# EAGLE board rbmc_smdfree (EAGLE 9.3.1)
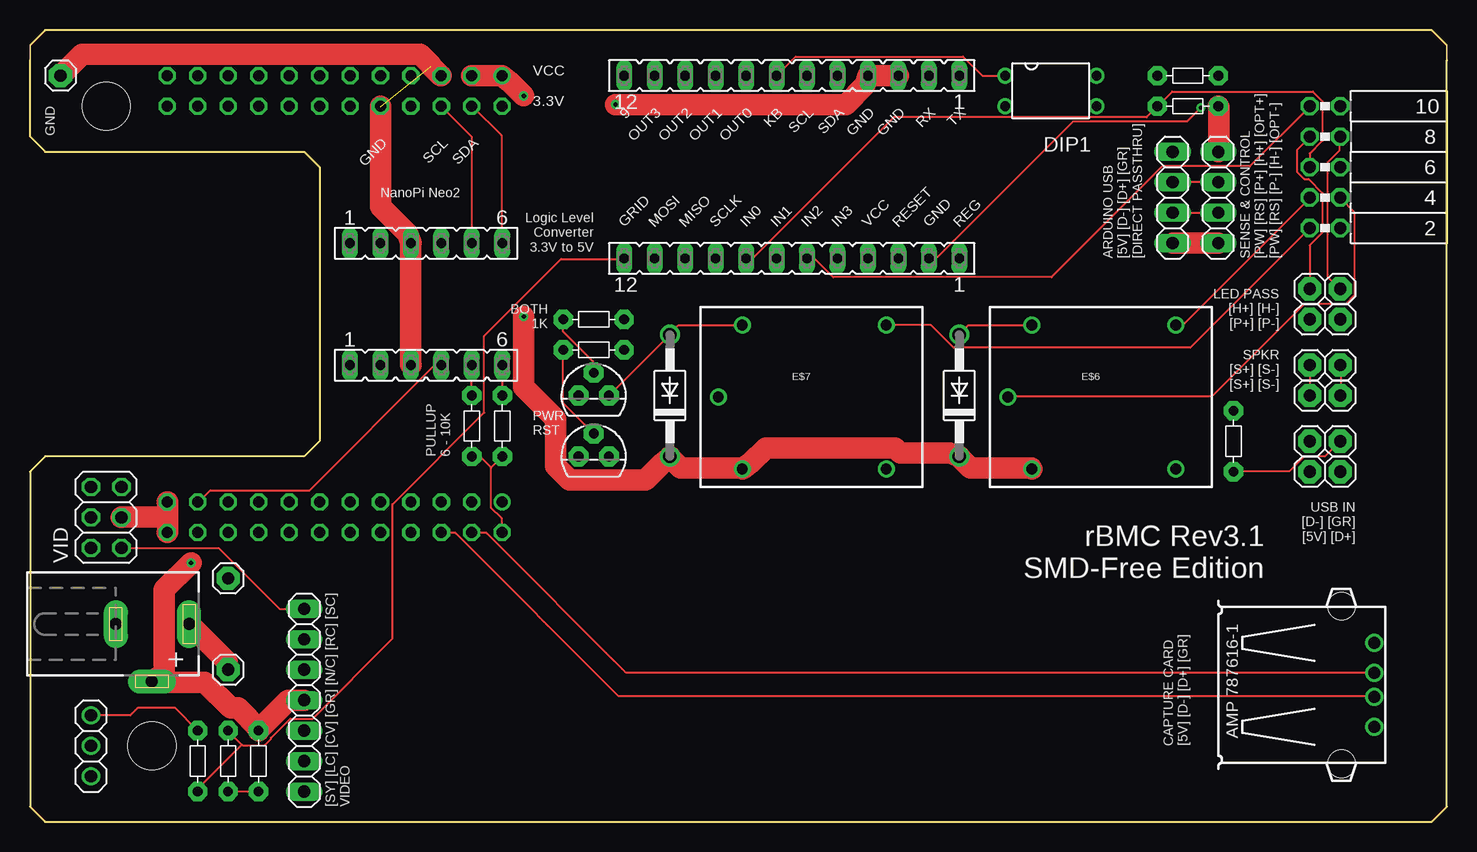
[diagram p0: board, top side]
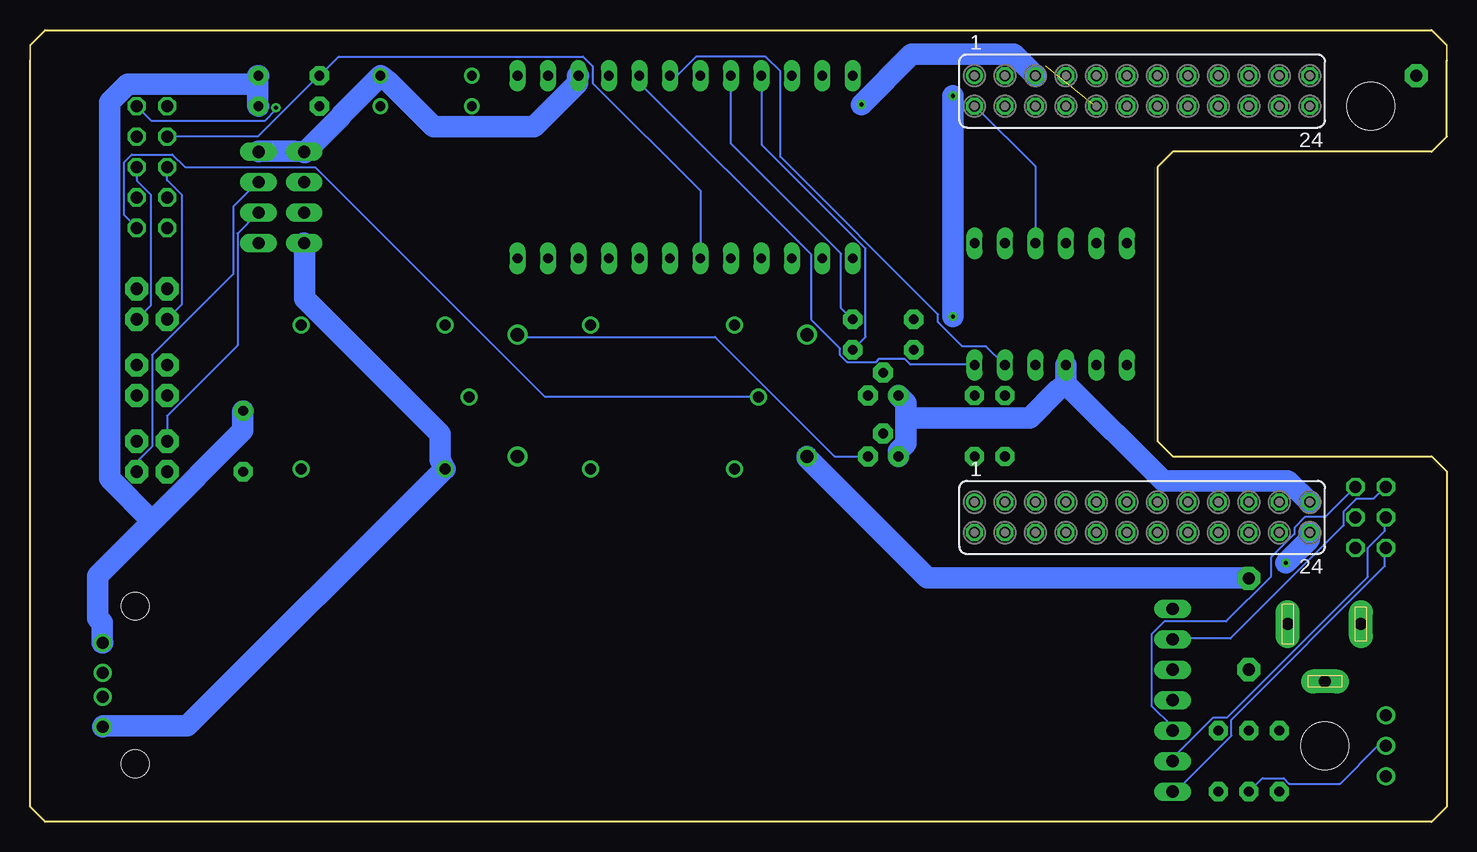
[diagram p1: board, bottom side, seen from below]

Size 118.11 x 66.04 mm. Coordinates in mm from the lower left corner, seen from the top.
Outline: 1.27,55.88 22.86,55.88 24.13,54.61 24.13,31.75 22.86,30.48 1.27,30.48 0,29.21 0,1.27 1.27,0 116.84,0 118.11,1.27 118.11,63.5 118.11,64.77 116.84,66.04 1.27,66.04 0,64.77 0,63.5 0,57.15 1.27,55.88
Copper layers (1*16): Top 0.035mm / dielectric 1.5mm / Bottom 0.035mm
Design rules "default *": minimum track width 6mil, minimum drill 0.35mm, track to track 8mil, track to pad 6mil, pad to pad 6mil, via to via 6mil, smd to smd 6mil, copper to edge 40mil, drill to drill 6mil, minimum pad ring 10mil, minimum via ring 8mil, stop-mask expansion 4mil, vias tented up to drill 0mil, thermal gap 10mil
Net classes: 1 vcc: width 1.778 mm; 2 gnd: width 1.778 mm; 3 data: width 0.127 mm
Holes 4 mm at 6.35,59.69 10.16,6.35

## Footprints (pad centres in the part's own frame; a part is rotated, then mirrored left to right if it is on the bottom)
DIP4 = drill 0.8: 1 -1.27,-3.81; 2 1.27,-3.81; 3 1.27,3.81; 4 -1.27,3.81
FE12 = drill 0.813 long: 1 -13.97,0; 2 -11.43,0; 3 -8.89,0; 4 -6.35,0; 5 -3.81,0; 6 -1.27,0; 7 1.27,0; 8 3.81,0; 9 6.35,0; 10 8.89,0; 11 11.43,0; 12 13.97,0
FE12-2 = drill 0.914: 1 -13.97,1.27 | drill 0.914 octagon: 2 -13.97,-1.27; 3 -11.43,1.27; 4 -11.43,-1.27; 5 -8.89,1.27; 6 -8.89,-1.27; 7 -6.35,1.27; 8 -6.35,-1.27; 9 -3.81,1.27; 10 -3.81,-1.27; 11 -1.27,1.27; 12 -1.27,-1.27; 13 1.27,1.27; 14 1.27,-1.27; 15 3.81,1.27; 16 3.81,-1.27; 17 6.35,1.27; 18 6.35,-1.27; 19 8.89,1.27; 20 8.89,-1.27; 21 11.43,1.27; 22 11.43,-1.27; 23 13.97,1.27; 24 13.97,-1.27
FE05-2W = drill 1.016 octagon: 1 -5.08,1.27; 2 -5.08,-1.27; 3 -2.54,1.27; 4 -2.54,-1.27; 5 0,1.27; 6 0,-1.27; 7 2.54,1.27; 8 2.54,-1.27; 9 5.08,1.27; 10 5.08,-1.27
SRD-05VDC-SL-C = drill 0.9: COIL0 -5.39,-6.12; COIL1 -5.39,5.88; SWCLOSED 6.61,-6.12; SWCOMMON -7.39,-0.12; SWOPEN 6.61,5.88
DO41-10 = drill 1.118: A 5.08,0; C -5.08,0
R-5 = drill 0.813 pad 1.6 octagon: 1 -2.54,0; 2 2.54,0
1X01 = drill 1.016 pad 1.93 octagon: 1 0,0
1X04 = drill 1.016 long: 1 -3.81,0; 2 -1.27,0; 3 1.27,0; 4 3.81,0
USB = drill 1: 1 -3.5,12.99; 2 -1,12.99; 3 1,12.99; 4 3.5,12.99 | hole 2.3: -6.57,10.28; 6.57,10.28
FE06 = drill 0.813 long: 1 -6.35,0; 2 -3.81,0; 3 -1.27,0; 4 1.27,0; 5 3.81,0; 6 6.35,0
TO92 = drill 0.813 pad 1.676 octagon: 1 -1.27,0; 2 0,1.905; 3 1.27,0
2X03 = drill 1.016 octagon: 1 -2.54,-1.27; 2 -2.54,1.27; 3 0,-1.27; 4 0,1.27; 5 2.54,-1.27; 6 2.54,1.27
1X07 = drill 1.016 long: 1 -7.62,0; 2 -5.08,0; 3 -2.54,0; 4 0,0; 5 2.54,0; 6 5.08,0; 7 7.62,0
DCJ0202 = drill 1 pad 2 long: 1 0,3.1; 2 4.8,0; 3 0,-3
1X03 = drill 1.016: 1 -2.54,0; 2 0,0; 3 2.54,0

## Placement (x,y rotation side)
DIP1  [DIP4]  85.09,60.96 270 top
E$1  [FE12]  63.5,62.23 180 top
E$2  [FE12-2]  25.4,25.4 0 bottom
E$3  [FE12]  63.5,46.99 180 top
E$4  [FE12-2]  25.4,60.96 0 bottom
E$5  [FE05-2W]  107.95,54.61 90 top
E$6  [SRD-05VDC-SL-C]  88.9,35.56 0 top
E$7  [SRD-05VDC-SL-C]  64.77,35.56 0 top
E$8  [DO41-10]  77.47,35.56 90 top
E$9  [DO41-10]  53.34,35.56 90 top
E$10  [R-5]  19.05,5.08 90 top
E$11  [1X01]  16.51,20.32 0 top
E$12  [R-5]  13.97,5.08 90 top
E$13  [R-5]  16.51,5.08 90 top
E$14  [1X01]  109.22,31.75 0 top
E$15  [1X01]  106.68,31.75 0 top
E$16  [1X01]  106.68,29.21 0 top
E$17  [1X01]  109.22,29.21 0 top
E$18  [1X01]  109.22,44.45 0 top
E$19  [1X01]  106.68,44.45 0 top
E$20  [1X01]  106.68,41.91 0 top
E$21  [1X01]  109.22,41.91 0 top
E$22  [1X01]  2.54,62.23 0 top
E$23  [R-5]  100.33,31.75 270 top
E$24  [1X04]  95.25,52.07 90 top
E$25  [1X04]  99.06,52.07 90 top
E$26  [R-5]  46.99,39.37 180 top
E$27  [R-5]  46.99,41.91 180 top
E$28  [1X01]  109.22,38.1 0 top
E$29  [1X01]  106.68,38.1 0 top
E$30  [1X01]  106.68,35.56 0 top
E$31  [1X01]  109.22,35.56 0 top
E$32  [USB]  99.06,11.43 270 top
E$33  [R-5]  96.52,62.23 0 top
E$34  [R-5]  96.52,59.69 0 top
E$35  [R-5]  36.83,33.02 270 top
E$36  [R-5]  39.37,33.02 270 top
HV  [FE06]  33.02,38.1 0 top
LV  [FE06]  33.02,48.26 0 top
PWRT  [TO92]  46.99,35.56 0 top
RSTT  [TO92]  46.99,30.48 0 top
SUPPLY  [1X01]  16.51,12.7 0 top
VID  [2X03]  6.35,25.4 90 top
VIDEOIN  [1X07]  22.86,10.16 90 top
VIN  [DCJ0202]  10.16,16.51 270 top
WALL  [1X03]  5.08,6.35 90 top

## Library data of the parts
DIP1 = optocoupler
E$1-E$5 HV LV = con-lsta
E$6 E$7 = SRD-05VDC-SL-C
E$8 E$9 = diode
E$10 E$12 E$13 E$23 E$26 E$27 E$33-E$36 = discrete
E$11 E$14-E$22 E$28-E$31 PWRT RSTT SUPPLY WALL = adafruit
E$24 E$25 VID VIDEOIN = pinhead
E$32 = con-amp
VIN = con-jack

## Nets
5V: E$2.2 E$35.2 E$36.2
CVBS: VID.5 VIDEOIN.3
DM1 [data]: E$2.6 E$32.3
DP1 [data]: E$2.4 E$32.2
GND [gnd]: DIP1.4 E$1.3 E$1.4 E$2.23 E$2.24 E$4.5 E$4.10 E$10.2 E$22.1 E$23.1 E$24.4 E$25.4 E$32.1 E$33.2 E$34.2 HV.3 LV.3 PWRT.1 RSTT.1 VID.3 VIDEOIN.4 VIN.2
GRID: E$12.2 WALL.3
GRID_GND: E$10.1 E$13.1 WALL.2
HDD+: E$3.7 E$5.7 E$19.1 E$33.1
HDD-: E$5.8 E$18.1
KB_CONN: DIP1.1 E$1.7
LC: VID.4 VIDEOIN.2
OUT0: E$1.8 E$27.1
OUT1: E$1.9 E$26.1
OUT2: E$1.10
OUT3: E$1.11
PC_D+: E$17.1 E$24.3 E$25.3
PC_D-: E$15.1 E$24.2 E$25.2
PCOIL_GND: E$7.COIL1 E$9.A PWRT.3
PWR+: E$3.8 E$5.5 E$20.1 E$34.1
PWR-: E$5.6 E$21.1
PWRPINA: E$5.1 E$7.SWOPEN
PWRPINB: E$5.2 E$7.SWCOMMON
PWRSENSE: E$3.12 E$12.1 E$13.2
RC: VID.6 VIDEOIN.6
RCOIL_GND: E$6.COIL1 E$8.A RSTT.3
RSTPINA: E$5.3 E$6.SWOPEN
RSTPINB: E$5.4 E$6.SWCOMMON
S$1: E$4.2 LV.4
S$3 [data]: E$4.4 LV.6
S$4 [data]: E$4.6 LV.5
S$7: E$2.21 HV.4
S$10: E$26.2 RSTT.2
S$13: E$27.2 PWRT.2
S$22: E$3.6 E$5.9
S$23: E$3.2 E$5.10
S$26: E$14.1 E$23.2
S+: E$29.1 E$30.1
S-: E$28.1 E$31.1
SC: VID.1 VIDEOIN.7
SCL5V [data]: E$1.6 E$35.1 HV.5
SDA5V [data]: E$1.5 E$36.1 HV.6
SUPPLY [vcc]: SUPPLY.1 VIN.1
SY: VID.2 VIDEOIN.1
VCC [vcc]: E$4.1 E$4.3 E$6.COIL0 E$7.COIL0 E$8.C E$9.C E$11.1 E$24.1 E$25.1 E$32.4

## Tracks (layer width: path | path; a pad name or v marks a point on that pad's centre or on a via)
5V
  Top 0.152: E$36.2 38.45,29.56 | 38.45,29.56 38.41,29.52 38.41,26.23 39.29,25.34 39.29,24.18 E$2.2 | 38.45,29.56 37.6,30.4 36.89,30.4 E$35.2
CVBS
  Bottom 0.152: VID.5 10.13,25.43 11.82,25.43 12.71,24.54 12.71,24 14.67,22.05 14.67,20.45 18.4,16.71 23.56,16.71 24.62,15.65 24.62,9.69 22.94,8 22.94,7.64 VIDEOIN.3
DM1
  Top 0.152: E$2.6 34.31,24.09 35.47,24.09 49.07,10.49 112.01,10.49 E$32.3
DP1
  Top 0.152: E$2.4 36.89,24.09 38.05,24.09 49.7,12.45 112.01,12.45 E$32.2
GND  (via drill 0.35)  (1 unrouted)
  Top 1.778: 19.11,7.73 19.02,7.64 E$10.2 | 19.11,7.73 21.51,10.13 22.85,10.13 VIDEOIN.4 | 19.11,7.73 17.34,9.51 16.71,9.51 14.58,11.65 10.22,11.65 VIN.2 11.2,12.45 11.2,19.38 v13.42,21.6 | 11.47,25.43 11.47,26.67 E$2.23 | 11.47,25.43 11.47,24.18 E$2.24 | 11.47,25.43 7.64,25.43 VID.3 | HV.3 31.74,38.14 31.74,48.18 LV.3 31.47,49.07 29.25,51.3 29.25,59.65 E$4.10 | E$4.5 34.23,62.23 33.43,63.03 33.43,63.12 32.54,64.01 4.36,64.01 2.58,62.23 E$22.1 | E$1.3 E$1.4 69.61,61.43 68.01,59.83 v48.81,59.83 | E$34.2 99.12,59.65 99.12,55.92 E$25.4
  Bottom 1.778: 45.07,33.69 45.07,34.94 45.7,35.56 PWRT.1 | 45.07,33.69 45.07,31.56 45.7,30.94 45.7,30.49 RSTT.1 | 31.74,36.54 23.65,28.45 13.25,28.45 11.47,26.67 E$2.23 | 31.74,36.54 31.74,38.05 HV.3 | 45.07,33.69 34.76,33.69 32.45,36.01 31.74,36.54 | v13.42,21.6 11.47,23.56 11.47,24.09 E$2.24 | 107.92,25.07 100.37,32.63 100.37,34.23 E$23.1 | 107.92,25.07 112.46,20.54 112.46,16.98 112.1,16.62 112.1,14.94 E$32.1 | 99.12,61.52 99.12,62.23 E$33.2 | 99.12,61.52 99.12,59.74 E$34.2 | E$25.4 99.03,55.92 96.1,55.92 E$24.4 95.21,55.83 92.19,58.85 92.19,58.94 DIP1.4 88.19,61.7 84.45,57.96 76.1,57.96 72.45,61.61 72.45,62.23 E$1.3 | 107.92,25.07 111.48,28.63 111.48,60.01 109.97,61.52 99.12,61.52 | v48.81,59.83 44.63,64.01 36.09,64.01 34.31,62.23 E$4.5
GRID
  Top 0.152: WALL.3 8.36,8.89 8.98,9.51 12.09,9.51 13.96,7.64 E$12.2
GRID_GND
  Top 0.152: E$10.1 19.02,2.58 16.54,2.58 E$13.1
  Bottom 0.152: WALL.2 5.16,6.31 5.78,6.31 8.89,3.2 13.16,3.2 13.6,3.65 15.38,3.65 16.45,2.58 E$13.1
HDD+
  Top 0.152: E$19.1 106.68,48.09 107.75,49.16 107.75,52.45 106.59,53.61 106.24,53.61 105.61,54.23 105.61,56.01 106.68,57.07 E$5.7
  Bottom 0.152: E$3.7 62.23,52.63 71.21,61.61 71.21,63.03 72.01,63.83 92.37,63.83 93.97,62.23 E$33.1 94.06,62.23 99.12,57.16 106.68,57.16 E$5.7
HDD-
  Top 0.152: E$5.8 109.17,57.07 109.17,56.01 108.19,55.03 108.19,45.43 109.17,44.45 E$18.1
KB_CONN
  Top 0.152: DIP1.1 79.39,62.23 77.79,63.83 63.83,63.83 E$1.7
LC
  Bottom 0.152: VID.4 5.16,25.34 5.16,24.27 6.58,22.85 6.58,20.45 18.31,8.71 19.47,8.71 22.85,5.33 22.85,5.16 VIDEOIN.2
OUT0
  Bottom 0.152: E$1.8 59.65,62.23 59.65,56.54 50.49,47.38 50.49,42.85 49.61,41.96 E$27.1
OUT1
  Bottom 0.152: E$26.1 48.45,40.45 48.45,47.83 57.07,56.45 57.07,62.23 E$1.9
PC_D+
  Top 0.152: E$25.3 E$24.3
  Bottom 0.152: E$17.1 109.17,29.25 109.17,30.05 107.92,31.29 107.92,38.94 101.17,45.7 101.17,51.3 99.12,53.34 E$25.3
PC_D-
  Top 0.152: E$24.2 95.3,50.76 99.03,50.76 E$25.2
  Bottom 0.152: E$15.1 106.68,33.87 100.81,39.74 100.81,49.07 99.12,50.76 E$25.2
PCOIL_GND
  Top 0.152: E$7.COIL1 59.3,41.43 54.05,41.43 53.34,40.72 E$9.A 53.34,40.63 48.27,35.56 PWRT.3
PWR+
  Top 0.152: E$3.8 59.74,47.03 60.27,47.03 72.01,58.76 93.08,58.76 93.97,59.65 E$34.1 94.06,59.74 95.21,60.9 106.95,60.9 107.75,60.1 107.75,56.81 106.68,55.74 E$5.5
  Bottom 0.152: E$5.5 106.68,53.52 105.44,52.27 105.44,43.2 106.68,41.96 E$20.1
PWR-
  Bottom 0.152: E$21.1 108.01,43.12 108.01,52.27 109.17,53.43 109.17,54.59 E$5.6
PWRPINA
  Top 0.152: E$7.SWOPEN 71.39,41.43 75.12,41.43 76.99,39.56 96.72,39.56 106.68,49.52 E$5.1
PWRPINB
  Bottom 0.152: E$7.SWCOMMON 57.43,35.47 75.21,35.47 94.32,54.59 105.17,54.59 106.24,55.65 109.61,55.65 110.24,55.03 110.24,50.58 109.26,49.61 E$5.2
PWRSENSE
  Top 0.152: 17.65,6.45 16.54,7.56 E$13.2 | 17.65,6.45 17.69,6.4 19.56,6.4 20.09,6.93 20.09,7.02 21.69,8.62 23.56,8.62 30.23,15.29 30.23,26.49 37.87,34.14 37.87,40.54 44.27,46.94 49.52,46.94 E$3.12 | 17.65,6.45 14.05,2.85 14.05,2.58 E$12.1
RC
  Bottom 0.152: VIDEOIN.6 22.85,15.29 18.05,15.29 8.62,24.71 8.62,25.87 7.56,26.94 6.13,26.94 5.16,27.91 VID.6
RCOIL_GND
  Top 0.152: E$6.COIL1 83.48,41.43 78.23,41.43 77.52,40.72 E$8.A
  Bottom 0.152: RSTT.3 48.27,30.49 51.03,30.49 60.98,40.45 77.25,40.45 77.43,40.63 E$8.A
RSTPINA
  Top 0.152: E$6.SWOPEN 95.57,41.52 96.19,41.52 106.68,52.01 E$5.3
RSTPINB
  Top 0.152: E$6.SWCOMMON 81.52,35.47 98.5,35.47 106.24,43.2 109.7,43.2 110.41,43.92 110.41,50.85 109.26,52.01 E$5.4
S$1
  Bottom 0.152: LV.4 34.31,48.27 34.31,54.67 39.29,59.65 E$4.2
S$3
  Top 0.152: LV.6 39.29,48.27 39.29,57.25 36.89,59.65 E$4.4
S$4
  Top 0.152: LV.5 36.8,48.27 36.8,57.16 34.31,59.65 E$4.6
S$7
  Top 0.152: HV.4 34.23,38.05 33.69,38.05 23.29,27.65 15.02,27.65 14.05,26.67 E$2.21
S$10
  Top 0.152: E$26.2 44.45,34.94 46.94,32.45 RSTT.2
S$13
  Top 0.152: E$27.2 44.45,40.89 46.94,38.41 46.94,37.52 PWRT.2
S$22
  Top 0.152: E$3.6 64.81,46.94 65.43,46.94 66.94,45.43 85.17,45.43 94.41,54.67 101.7,54.67 106.68,59.65 E$5.9
S$23  (via drill 0.35)
  Top 0.152: v97.61,59.56 96.46,58.41 86.94,58.41 75.56,47.03 74.94,47.03 E$3.2
  Bottom 0.152: v97.61,59.56 97.61,59.38 98.5,58.5 108.01,58.5 109.17,59.65 E$5.10
S$26
  Top 0.152: E$23.2 100.37,29.25 104.99,29.25 106.24,30.49 107.92,30.49 109.17,31.74 E$14.1
S+
  Top 0.152: E$29.1 E$30.1
S-
  Top 0.152: E$31.1 109.26,35.56 109.26,38.05 E$28.1
SC
  Top 0.152: VIDEOIN.7 20.8,17.78 15.73,22.85 7.64,22.85 VID.1
SCL5V
  Top 0.152: HV.5 36.8,38.05 36.8,35.56 E$35.1
  Bottom 0.152: E$1.6 64.19,62.23 62.59,63.83 56.81,63.83 55.56,62.59 55.56,55.47 42.41,42.32 42.41,41.69 40.36,39.65 38.41,39.65 36.89,38.14 HV.5
SDA5V
  Top 0.152: HV.6 39.38,38.05 39.38,35.56 E$36.1
  Bottom 0.152: E$1.5 67.3,62.23 67.3,61.61 52.98,47.3 52.98,41.87 50.58,39.47 50.58,38.94 49.96,38.32 47.65,38.32 47.38,38.58 45.16,38.58 44.72,38.14 39.38,38.14 HV.6
SUPPLY
  Top 1.778: SUPPLY.1 16.45,12.71 16.45,13.34 13.34,16.45 VIN.1
SY
  Bottom 0.152: VID.2 5.16,22.85 5.16,21.34 17.96,8.53 17.96,7.2 22.58,2.58 22.85,2.58 VIDEOIN.1
VCC  (via drill 0.35)
  Top 1.778: E$24.1 95.3,48.27 99.03,48.27 E$25.1 | E$6.COIL0 83.48,29.52 78.41,29.52 77.52,30.4 E$8.C 76.63,30.76 72.54,30.76 72.1,31.2 61.34,31.2 60.1,29.96 E$7.COIL0 59.3,29.52 54.23,29.52 53.34,30.4 | 39.29,62.23 E$4.3 | 39.29,62.23 E$4.1 | 53.34,30.4 E$9.C | v41.16,60.54 40.01,61.7 39.29,62.23 | v41.16,42.14 41.16,36.27 43.83,33.6 43.83,29.69 44.98,28.54 51.3,28.54 52.63,29.87 53.34,30.4
  Bottom 1.778: 83.57,29.43 104.99,8 112.01,8 E$32.4 | 83.57,29.43 E$6.COIL0 | E$24.1 95.21,48.18 95.21,43.65 83.92,32.36 83.92,30.23 83.57,29.43 | v41.16,42.14 v41.16,60.54 | E$11.1 16.54,20.36 43.29,20.36 53.34,30.4 E$9.C

## Text on the board
tPlace: VCC | GND | 3.3V | 9 | OUT3 | OUT2 | OUT1 | OUT0 | KB | SCL | SDA | GND | GND | RX | TX | GND | SCL | SDA | NanoPi Neo2 | Logic Level / Converter / 3.3V to 5V | GRID | MOSI | MISO | SCLK | IN0 | IN1 | IN2 | IN3 | VCC | RESET | GND | REG | ARDUINO USB / [5V] [D-] [D+] [GR] / [DIRECT PASSTHRU] | SENSE & CONTROL / [PW] [RS] [P+] [H+] [OPT+] / [PW] [RS] [P-] [H-] [OPT-] | LED PASS / [H+] [H-] / [P+] [P-] | BOTH / 1K | SPKR / [S+] [S-] / [S+] [S-] | PWR / RST | PULLUP / 6 - 10K | USB IN / [D-] [GR] / [5V] [D+] | rBMC Rev3.1 / SMD-Free Edition | + | CAPTURE CARD / [5V] [D-] [D+] [GR] | [SY] [LC] [CV] [GR] [N/C] [RC] [SC] / VIDEO